# EAGLE board micro (EAGLE 7.6.0)

Size 25.5 x 16 mm. Coordinates in mm from the lower left corner, seen from the top.
Outline: 23,16 23,13.5 25.5,13.5 25.5,2.5 23,2.5 23,0 0,0 arc139 0,16 23,16
Copper layers (1*16): Top 0.035mm / dielectric 1.5mm / Bottom 0.035mm
Design rules "default": minimum track width 10mil, minimum drill 24mil, track to track 8mil, track to pad 8mil, pad to pad 8mil, via to via 8mil, smd to smd 8mil, copper to edge 40mil, drill to drill 8mil, minimum pad ring 10mil, minimum via ring 8mil, stop-mask expansion 4mil, vias tented up to drill 0mil, thermal gap 10mil

## Footprints (pad centres in the part's own frame; a part is rotated, then mirrored left to right if it is on the bottom)
C0402K = smd 0.925 x 0.74: 1 -0.6,0; 2 0.6,0
PTC-1206 = smd 1 x 1.8: 1 -1.4,0; 2 1.4,0
USB-MICROB = smd 0.35 x 1.4: D+ 0,2.65; D- -0.65,2.65; GND 1.3,2.65; ID 0.65,2.65; VBUS -1.3,2.65 | smd 1.8 x 1.9: MT1 -4,0; MT2 4,0 | smd 1.9 x 1.9: P$1 -1.27,0; P$2 1.27,0
1616 = smd 0.65 x 1.2: B -0.475,-0.9; CA -0.475,0.9; G 0.475,-0.9; R 0.475,0.9
SOT23-3 = smd 0.8 x 0.9: 1 -0.95,-1; 2 0.95,-1; 3 0,1.1
SSOT-3 = smd 1 x 1.4: 1 -0.95,-1.1; 2 0.95,-1.1; 3 0,1.1
R0402 = smd 0.7 x 0.9: 1 -0.65,0; 2 0.65,0
YC124 = smd 0.4 x 0.4: 1 -0.8,-0.35; 4 0.8,-0.35; 5 0.8,0.35; 8 -0.8,0.35 | smd 0.3 x 0.4: 2 -0.25,-0.35; 3 0.25,-0.35; 6 0.25,0.35; 7 -0.25,0.35
TQFP32-08 = smd 1.27 x 0.559: 1 -4.293,2.8; 2 -4.293,2; 3 -4.293,1.2; 4 -4.293,0.4; 5 -4.293,-0.4; 6 -4.293,-1.2; 7 -4.293,-2; 8 -4.293,-2.8; 17 4.293,-2.8; 18 4.293,-2; 19 4.293,-1.2; 20 4.293,-0.4; 21 4.293,0.4; 22 4.293,1.2; 23 4.293,2; 24 4.293,2.8 | smd 0.559 x 1.27: 9 -2.8,-4.293; 10 -2,-4.293; 11 -1.2,-4.293; 12 -0.4,-4.293; 13 0.4,-4.293; 14 1.2,-4.293; 15 2,-4.293; 16 2.8,-4.293; 25 2.8,4.293; 26 2,4.293; 27 1.2,4.293; 28 0.4,4.293; 29 -0.4,4.293; 30 -1.2,4.293; 31 -2,4.293; 32 -2.8,4.293
1X3 = drill 0.635 pad 1.016: 1 0,0; 2 1.27,0; 3 2.54,0
1X8_MALE = drill 0.635 pad 1.016: 1 0,0; 2 1.27,0; 3 2.54,0; 4 3.81,0; 5 5.08,0; 6 6.35,0; 7 7.62,0; 8 8.89,0
SOIC16 = smd 0.635 x 1.524: 1 -4.445,-2.695; 2 -3.175,-2.695; 3 -1.905,-2.695; 4 -0.635,-2.695; 5 0.635,-2.695; 6 1.905,-2.695; 7 3.175,-2.695; 8 4.445,-2.695; 9 4.445,2.695; 10 3.175,2.695; 11 1.905,2.695; 12 0.635,2.695; 13 -0.635,2.695; 14 -1.905,2.695; 15 -3.175,2.695; 16 -4.445,2.695
OSC3225 = smd 1.2 x 0.95: P$1 -1.1,-0.875; P$2 1.1,-0.875; P$3 1.1,0.875; P$4 -1.1,0.875
GSX-531 = smd 1.6 x 1.3: P$1 -1.9,-1.15; P$2 1.9,-1.15; P$3 1.9,1.15; P$4 -1.9,1.15

## Placement (x,y rotation side)
C1  22p  [C0402K]  4.5,5 270 top
C2  22p  [C0402K]  41.5,13.5 0 top  (outside the outline)
C3  22p  [C0402K]  41.5,9.5 0 top  (outside the outline)
C4  100n  [C0402K]  41.5,5.5 0 top  (outside the outline)
C5  100n  [C0402K]  41.5,1.5 0 top  (outside the outline)
C6  100n  [C0402K]  17,13 0 top
C7  100n  [C0402K]  7.5,8.5 180 top
C9  100n  [C0402K]  22,7.5 0 top
C10  22p  [C0402K]  7.5,7.5 180 top
F1  PTCSMD  [PTC-1206]  38,3 0 top  (outside the outline)
J1  USB-MICROB  [USB-MICROB]  14.5,1.5 0 bottom
LED1  100F0606-RGB-CA  [1616]  22,12 180 top
Q1  BSS138  [SOT23-3]  7.5,11.5 90 top
Q2  FDN340P  [SSOT-3]  45.5,4.5 90 top  (outside the outline)
R1  10k  [R0402]  14,13 180 top
R2  [R0402]  22,8.5 180 top
R3  [R0402]  22,6.5 180 top
RN1  [YC124]  20,12 270 top
U1  ATMEGA328P_TQFP  [TQFP32-08]  15.5,7.5 0 top
U$1  1X3  [1X3]  6,1.5 180 bottom
U$2  1X3  [1X3]  6,14.5 180 bottom
U$3  1X8MALE  [1X8_MALE]  24,12.5 270 top
U$4  1X8MALE  [1X8_MALE]  13,14.5 0 top
U$5  CH340G  [SOIC16]  35,10.5 0 top  (outside the outline)
U$6  16Mhz  [OSC3225]  7.5,5 180 top
Y2  12MHz  [GSX-531]  32,3 0 top  (outside the outline)

## Library data of the parts
C1-C7 C9 C10 R1-R3 = rcl
F1 = SparkFun-PowerIC; PROD_ID: RES-11150
J1 = SparkFun-Connectors; PROD_ID: CONN-09505
LED1 = 100F0606-RGB-CA
Q1 = SparkFun-DiscreteSemi; PROD_ID: TRANS-00830
Q2 = transistor-fet
RN1 = resistor-dil; OC_FARNELL: unknown; OC_NEWARK: unknown
U1 = SparkFun-DigitalIC; PROD_ID: IC-09069
U$1-U$4 = headers(.05in)
U$5 = ch340g
U$6 = crystals_golledge_full_v1-0; HEIGHT: 0.8
Y2 = crystals_golledge_full_v1-0; HEIGHT: 0.7

## Nets
5V: C5.1 C7.1 C9.1 LED1.CA Q2.2 R1.2 U1.4 U1.6 U1.18 U1.20 U$2.1 U$5.16
CS: U1.14
D+: J1.D+ U$5.5
D-: J1.D- U$5.6
DATA: Q1.3 U1.30
DATA_DIR_BIT: Q1.1 U1.32
DI: U1.10
DIR: U1.12
DS18B20: U1.9
EN: U1.11
GND: C1.2 C2.2 C3.2 C4.2 C5.2 C6.2 C7.2 C9.2 C10.2 J1.GND J1.MT1 J1.MT2 R2.1 U1.3 U1.5 U1.21 U$1.2 U$5.1
INT: U1.19 U$2.2
N$1: C2.1 U$5.8 Y2.P$1
N$2: C3.1 U$5.7 Y2.P$3
N$3: C1.1 U1.8 U$6.P$3
N$4: C4.1 U$5.4
N$5: C10.1 U1.7 U$6.P$1
N$6: F1.1 J1.VBUS
N$7: Q1.2 U1.31
N$8: R2.2 R3.1 U1.23
N$9: RN1.2 U1.26
N$10: RN1.3 U1.25
N$11: RN1.4 U1.24
N$13: LED1.R RN1.5
N$14: LED1.G RN1.6
N$15: LED1.B RN1.7
PWM: U1.13
PWM_1: U1.22 U$2.3
RST: C6.1 R1.1 U1.29
RX: U1.1 U$5.3
SCK: U1.17
SCL: U1.28 U$1.1
SDA: U1.27 U$1.3
SI: U1.15
SO: U1.16
TX: U1.2 U$5.2
V_USB: F1.2 Q2.3
VIN: Q2.1 R3.2

## Tracks (layer width: path | path; a pad name or v marks a point on that pad's centre or on a via)
5V  (11 unrouted)
D+  (1 unrouted)
D-  (1 unrouted)
DATA  (1 unrouted)
DATA_DIR_BIT  (1 unrouted)
GND  (17 unrouted)
INT  (1 unrouted)
N$1  (2 unrouted)
N$2  (2 unrouted)
N$3  (2 unrouted)
N$4  (1 unrouted)
N$5  (2 unrouted)
N$6  (1 unrouted)
N$7  (1 unrouted)
N$8  (2 unrouted)
N$9  (1 unrouted)
N$10  (1 unrouted)
N$11  (1 unrouted)
N$13  (1 unrouted)
N$14  (1 unrouted)
N$15  (1 unrouted)
PWM_1  (1 unrouted)
RST  (2 unrouted)
RX  (1 unrouted)
SCL  (1 unrouted)
SDA  (1 unrouted)
TX  (1 unrouted)
V_USB  (1 unrouted)
VIN  (1 unrouted)